# Altium PCB PCB_Master_Screen_V2.00.PcbDoc
Units mm, origin at the board's own origin, x right, y up, seen from the top; angles counter-clockwise.
Board outline 116.97 x 59.18 mm, 2 copper layers (Top Layer, Bottom Layer), stack 1.571 mm thick; 47 components, 37 nets, 220 pads, 201 vias.
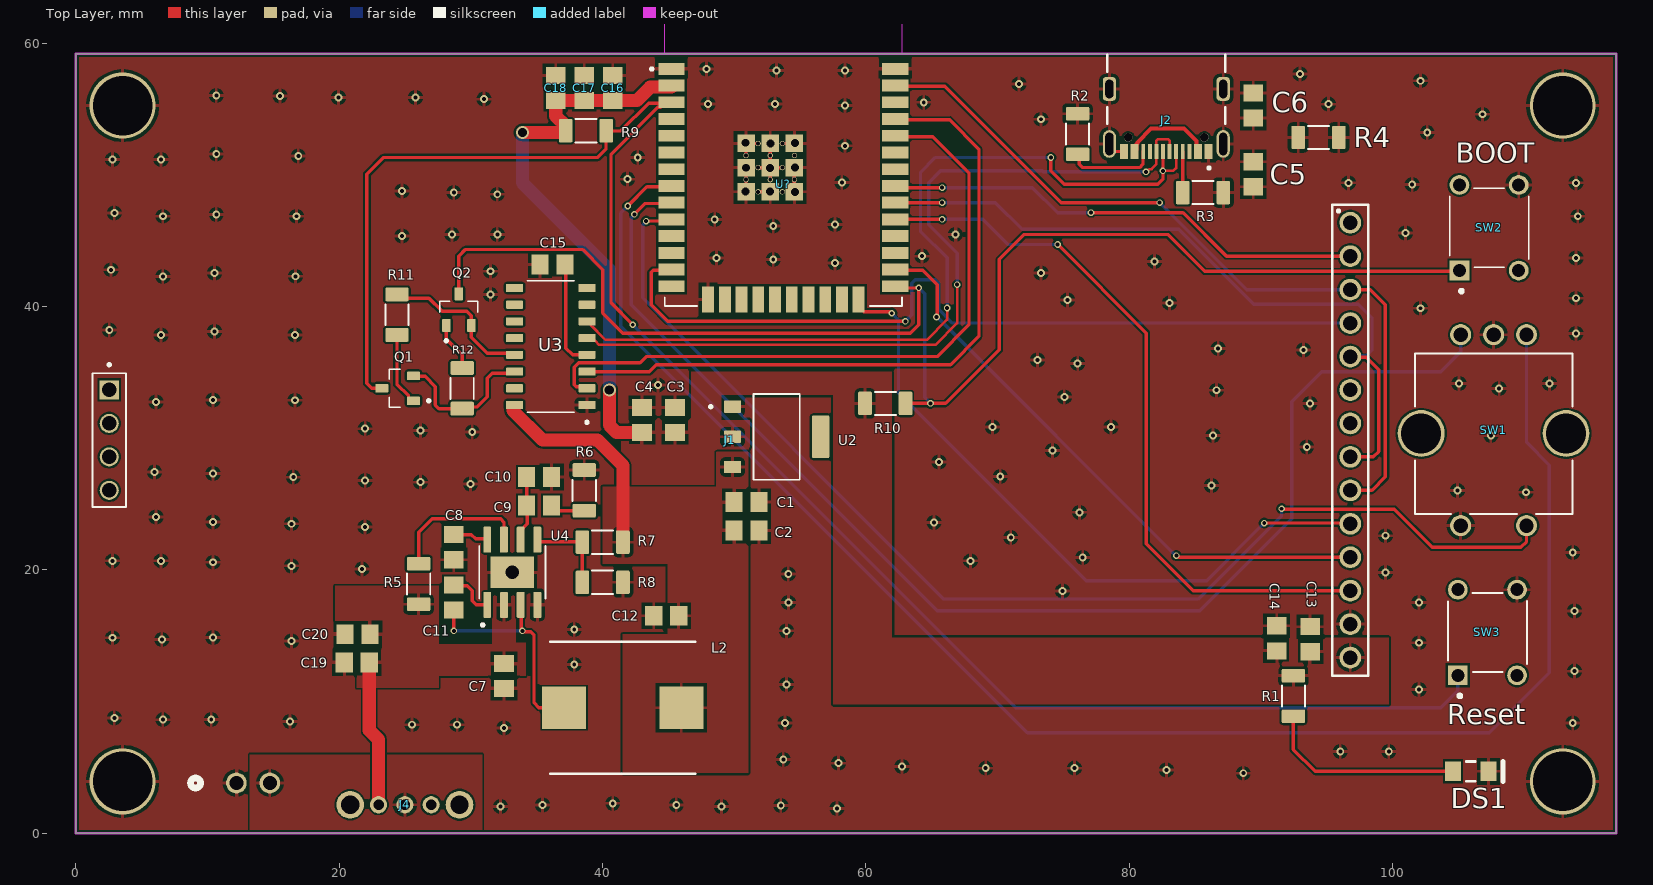
[diagram p0: Top Layer view]
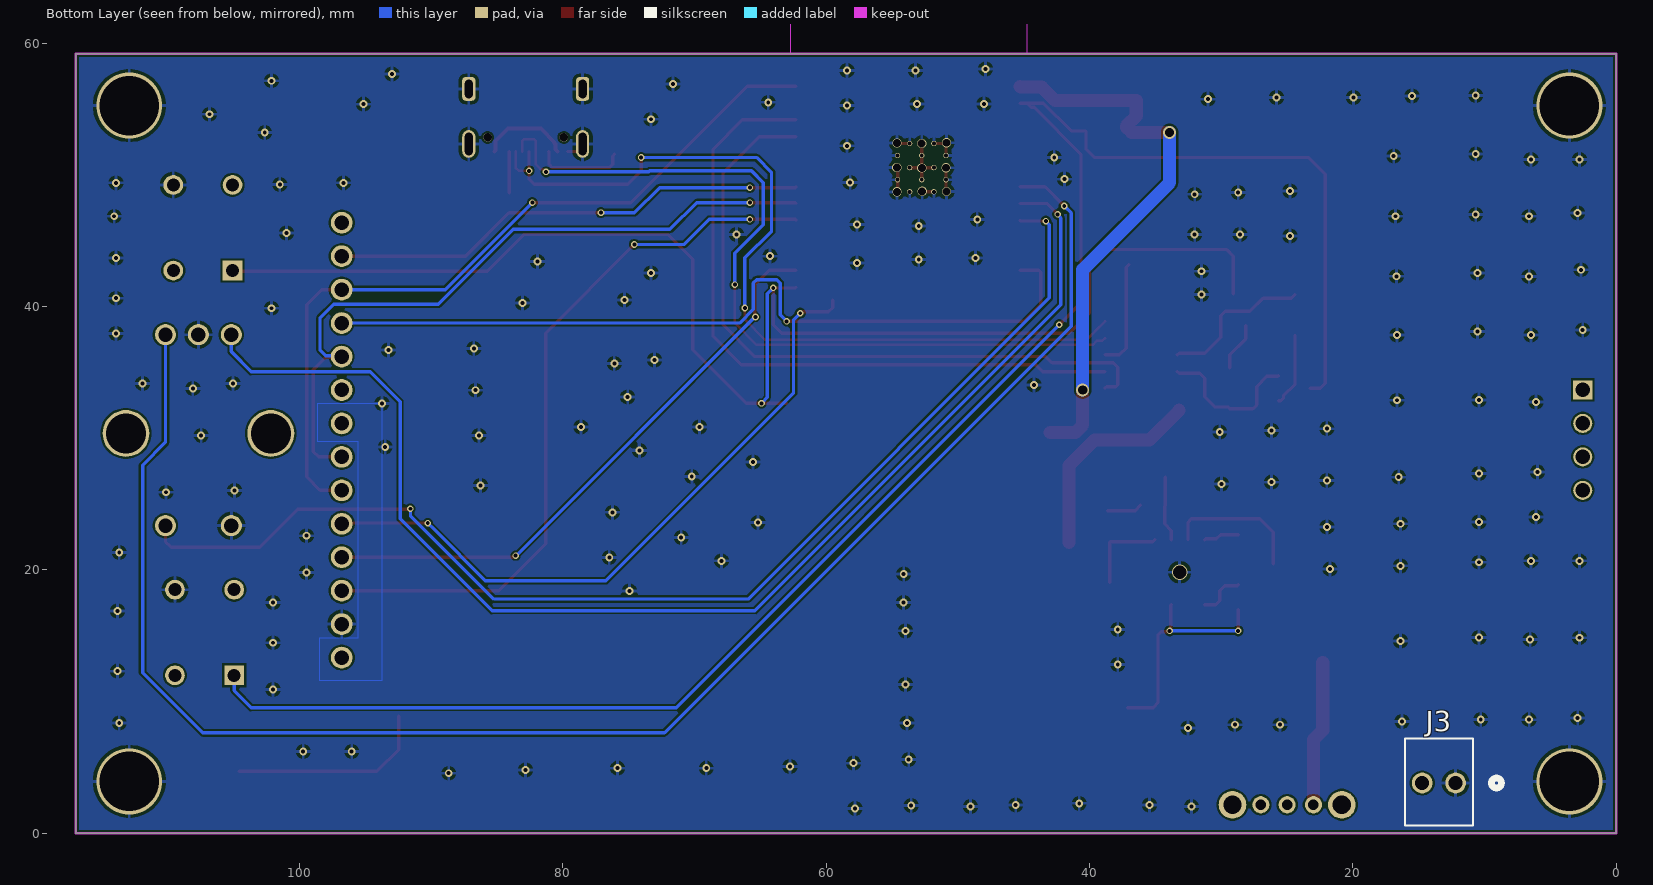
[diagram p1: Bottom Layer view, seen from below]
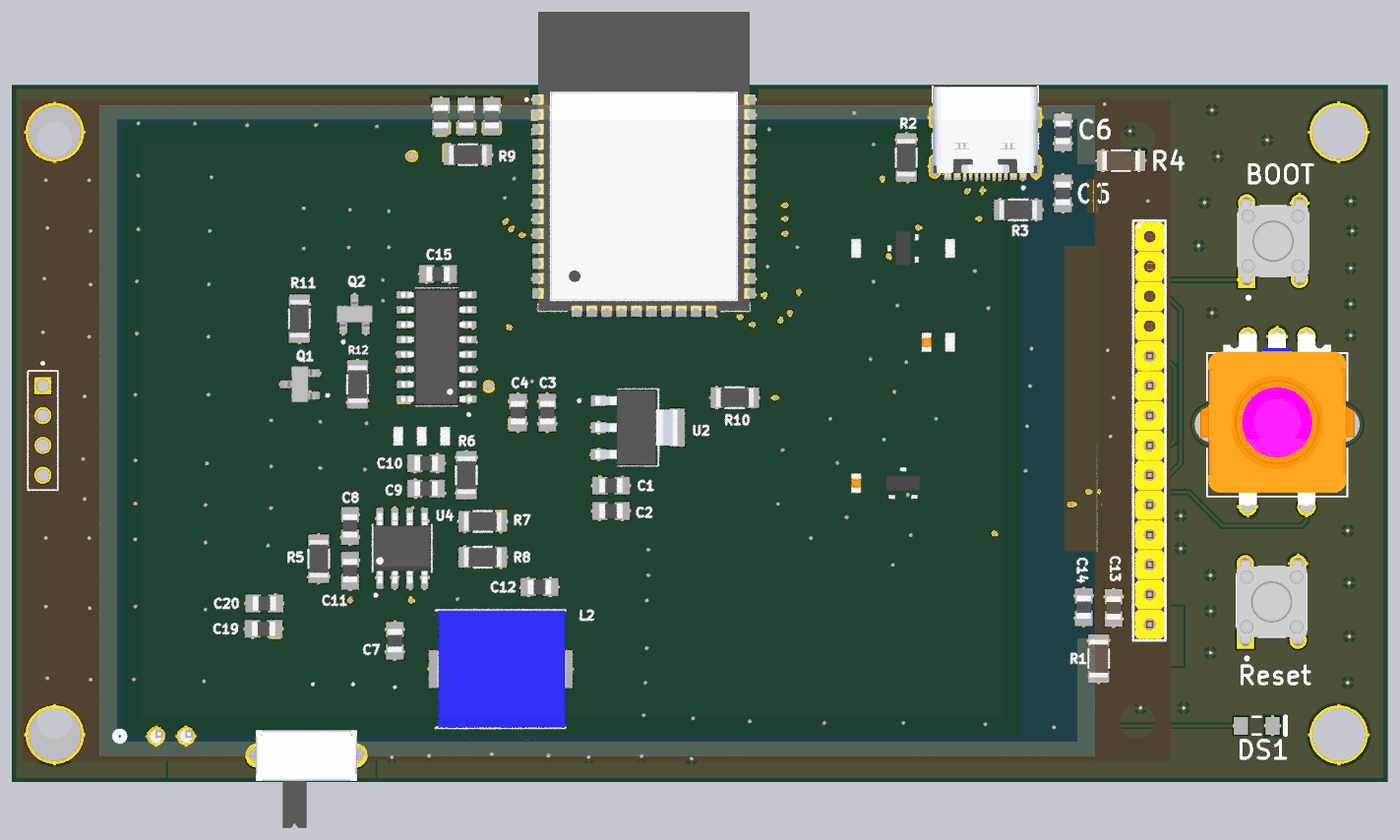
[diagram p2: 3D render of the assembled board from above, using the file's embedded part models]

## Layer stack, top to bottom
Top Solder: solder mask 0.0102, Solder Resist, Dk 3.5
Top Layer: signal copper 0.0356
Dielectric 1: dielectric 1.5, FR-4, Dk 4.8
Bottom Layer: signal copper 0.0356
Bottom Solder: solder mask 0.0102, Solder Resist, Dk 3.5

## Board outline
0,0 116.967,0 116.967,59.182 0,59.182

## Design rules (kind name [scope] priority, off if disabled: settings)
Clearance [All] p1: gap=0.15 ignorepadtopadclearanceinfootprint=FALSE
HoleSize [All] p1: absolutevalues=TRUE maxlimit=6.3 minlimit=0.3 maxpercent=80.000 minpercent=20.000
MinimumSolderMaskSliver [InComponent('U4')] p1: minsoldermaskwidth=0.05
MinimumSolderMaskSliver MinimumSolderMaskSliver_1 [All] p2: minsoldermaskwidth=0.1
PolygonConnect [All] p1: connectstyle=Relief reliefconductorwidth=0.254 reliefentries=4 polygonreliefangle="90 Angle" airgapwidth=0.254
RoutingVias [All] p1: holewidth=0.3 width=0.5 viastyle="Through Hole" minholewidth=0.3 minwidth=0.4 maxholewidth=6.3 maxwidth=7
SilkToSolderMaskClearance SilkToSolderMaskClearance_R [HasFootprint('RES1206')] p1: minsilkscreentomaskgap=0.1 clearancetoexposedcopper=TRUE
SilkToSolderMaskClearance [IsPad] p2: minsilkscreentomaskgap=0.2 clearancetoexposedcopper=TRUE
SolderMaskExpansion [All] p1: expansion=0.102 istentingtop=FALSE
SupplyNets "Schematic Supply Nets_4" [InNet('VIN')] p1: voltage=0.000
SupplyNets "Schematic Supply Nets_3" [InNet('5V0')] p2: voltage=0.000
SupplyNets "Schematic Supply Nets_2" [InNet('VBAT')] p3: voltage=0.000
SupplyNets "Schematic Supply Nets_1" [InNet('GND')] p4: voltage=0.000
SupplyNets "Schematic Supply Nets" [InNet('3V3')] p5: voltage=0.000
Width Width_Pwr [InNet('3V3') OR InNet('5V0') OR InNet('VBAT')] p1: maxlimit=2 minlimit=1 preferedwidth=1.2
Width Width_1 [All] p2: maxlimit=1.5 minlimit=0.2 preferedwidth=0.254 minimp=50.000000 maximp=50.000000 favimp=50.000000
27 further rules are at their usual default settings.

## Components (designator, comment, footprint, x,y, rotation, side; value= is the part's Value field where it differs from the comment)
C1 "10uF" CAP0805 50.927,25.146 r180 top value=805
C2 "100nF" CAP0805 50.927,22.987 r180 top value=805
C3 "22uF" CAP0805 45.5,31.369 r90 top value=805
C4 "100nF" CAP0805 43,31.369 r90 top value=805
C5 "100nF" CAP0805 89.408,50.038 r270 top value=805
C6 "1nF" CAP0805 89.408,55.245 r270 top value=805
C7 "4.7uF" CAP0805 32.512,11.938 r90 top value=805
C8 "0.1uF" CAP0805 28.702,21.717 r90 top value=805
C9 "6.8nF" CAP0805 35.179,24.892 r180 top value=805
C10 "0.1nF" CAP0805 35.179,27.051 r180 top value=805
C11 "10nF" CAP0805 28.702,17.907 r270 top value=805
C12 "10uF" CAP0805 44.831,16.51 r0 top value=805
C13 "100nF" CAP0805 93.726,14.732 r270 top value=805
C14 "10uF" CAP0805 91.186,14.798 r270 top value=805
C15 "100nF" CAP0805 36.195,43.18 r180 top value=805
C16 "47uF" CAP0805 40.767,56.581 r90 top value=805
C17 "22uF" CAP0805 38.608,56.581 r90 top value=805
C18 "100nF" CAP0805 36.449,56.581 r90 top value=805
C19 "47uF" CAP0805 21.336,12.954 r0 top value=805
C20 "100nF" CAP0805 21.402,15.113 r0 top value=805
DS1 "Red LED" LUMX-SML-LX1206IC_V 105.918,4.699 r0 top
J1 "TFT_3.5_INCH" 61301411121 96.774,29.845 r270 top locked value="3.5-inch TFT LCD (320 × 480)"
J2 "USB Type C 16P" GCT_USB4105-GF-A-060 82.804,56.515 r180 top value="16 Pin"
J3 "Battery Connector" CONN_A-6373-02A_MOL 12.192,3.81 r0 bottom value="2POS 2.54MM"
J4 "SK12D07VG4" SK12D07VG4 24.987,2.159 r0 top value="0.3A @ 30 VDC"
L2 "10uH" INDPM110100X400N 41.529,9.525 r0 top value="11 mm x 10 mm"
Q1 "MMBT3904" TRANS_MMBT3904 24.441,33.782 r180 top value=NPN
Q2 "MMBT3904" TRANS_MMBT3904 29.083,39.751 r90 top value=NPN
R1 "1K" RES1206 92.456,10.414 r270 top value=1206
R2 "5.1K" RES1206 76.073,53.086 r270 top value=1206
R3 "5.1K" RES1206 85.598,48.641 r180 top value=1206
R4 "1M" RES1206 94.361,52.832 r180 top value=1206
R5 "100K" RES1206 26.035,18.923 r270 top value=1206
R6 "6.8K" RES1206 38.608,26.035 r270 top value=1206
R7 "44.2K" RES1206 40.005,22.098 r0 top value=1206
R8 "10K" RES1206 40.005,19.05 r180 top value=1206
R9 "10K" RES1206 38.735,53.34 r180 top value=1206
R10 "10K" RES1206 61.468,32.639 r180 top value=1206
R11 "10K" RES1206 24.384,39.37 r90 top value=1206
R12 "10K" RES1206 29.337,33.782 r90 top value=1206
SW1 "EC11E15244G1" EC11E15244G1_AAL 110.157,37.853 r180 top value="10mA 5V DC"
SW2 "2-1825910-7" SW_2-1825910-7 107.315,45.974 r90 top value="Button 6mm"
SW3 "2-1825910-7" SW_2-1825910-7 107.188,15.24 r90 top value="Button 6mm"
U2 "AMS1117-3.3" SOT229P700X180-4N 53.213,30.099 r0 top value="0.8A, 15V"
U3 "CH340C" SOIC127P600X180-16N 36.068,36.957 r180 top value="USB to serial chip"
U4 "MP1484EN-LF" SOIC127P600X170-9N 33.147,19.812 r90 top value="0.925V 1 Output 3A"
U? "ESP32-WROOM-32" MODULE_ESP32-WROOM-32 53.73,52.779 r0 top value="Dual Core, Wi-Fi, BLE"

## Footprints (in the part's own frame and the unit in brackets; to place one, negate y for a bottom-side part, rotate by r counter-clockwise, add the part's x,y. Pads: shape width x height; smd on the part's side, far side on the other; paste and mask are expansions set on the pad)
61301411121 [mm]
  round 1.65 hole 1.1: 1(-16.51,0) 2(-13.97,0) 3(-11.43,0) 4(-8.89,0) 5(-6.35,0) 6(-3.81,0) 7(-1.27,0) 8(1.27,0) 9(3.81,0) 10(6.35,0) 11(8.89,0) 12(11.43,0) 13(13.97,0) 14(16.51,0)
  rect 1.45x1.45 / inner round 1.45 / far side rect 1.45x1.45 hole 1.1: 01(-3.81,-94.234)
  round 1.45 hole 1.1: 02(-1.27,-94.234) 03(1.27,-94.234) 04(3.81,-94.234)
  silkscreen extent -17.88,-95.5 17.88,1.37, body extent -28.15,-96.02 28.15,1.78, height 4.4
CAP0805 [mm]
  rect 1.3x1.5 smd: 1(-0.95,0) 2(0.95,0)
  body extent -1,-0.63 1,0.63, height 0.7
CONN_A-6373-02A_MOL [mil]
  round 62 hole 42: 1(0,0) 2(100,0)
  silkscreen extent -137,-133 152,127, body extent -37,-135 157,115, height 420
EC11E15244G1_AAL [mil]
  round 140 / inner round 60 / far side round 140 hole 120 paste-99999 mask-70: 6(-118.11,295.28) 7(314.96,295.28)
  round 63 / inner round 60 / far side round 63 hole 43: A(0,0) B(196.85,0)
  round 63 / inner round 60 / far side round 63 hole 43 unplated: C(98.43,0) E(196.85,570.87)
  round 63 hole 43: D(0,570.87)
  silkscreen extent -137,55 334,536, body extent -159,-16 356,572, height 965
GCT_USB4105-GF-A-060 [mm]
  rect 0.6x1.15 smd: A1(-3.2,4.755) A4(-2.4,4.755) B1(3.2,4.755) B4(2.4,4.755)
  rect 0.3x1.15 smd: A5(-1.25,4.755) A6(-0.25,4.755) A7(0.25,4.755) A8(1.25,4.755) B5(1.75,4.755) B6(0.75,4.755) B7(-0.75,4.755) B8(-1.75,4.755)
  oval 1x2.1 hole 0.6 slot 1.7 at 90 deg: SH1(-4.32,4.18) SH2(4.32,4.18)
  rrect50% 1x1.8 hole 0.6 slot 1.4 at 90 deg: SH3(-4.32,0) SH4(4.32,0)
  round 0.65 hole 0.65 unplated: ""(-2.89,3.68) ""(2.89,3.68)
  silkscreen extent -4.47,-2.6 4.47,6.1, body extent -4.47,-2.6 4.47,5.11, height 3.31
INDPM110100X400N [mm]
  rect 3.35x3.2 smd: 1(-4.45,0) 2(4.45,0)
  silkscreen extent -5.5,-5 5.5,5, body extent -5.41,-5 5.59,5, height 4
LUMX-SML-LX1206IC_V [mm] "SMD, 2-Leads, Body 3.2x1.5mm"
  rect 1.2x1.5 smd: 1(-1.35,0) 2(1.35,0)
  silkscreen extent -0.35,-0.75 2.45,0.75, body extent -1.6,-0.8 1.6,0.8, height 1.1
MODULE_ESP32-WROOM-32 [mm]
  rect 2x0.9 smd: 1(-8.5,5.26) 2(-8.5,3.99) 3(-8.5,2.72) 4(-8.5,1.45) 5(-8.5,0.18) 6(-8.5,-1.09) 7(-8.5,-2.36) 8(-8.5,-3.63) 9(-8.5,-4.9) 10(-8.5,-6.17) 11(-8.5,-7.44) 12(-8.5,-8.71) 13(-8.5,-9.98) 14(-8.5,-11.25) 25(8.5,-11.25) 26(8.5,-9.98) 27(8.5,-8.71) 28(8.5,-7.44) 29(8.5,-6.17) 30(8.5,-4.9) 31(8.5,-3.63) 32(8.5,-2.36) 33(8.5,-1.09) 34(8.5,0.18) 35(8.5,1.45) 36(8.5,2.72) 37(8.5,3.99) 38(8.5,5.26)
  rect 0.9x2 smd: 15(-5.715,-12.25) 16(-4.445,-12.25) 17(-3.175,-12.25) 18(-1.905,-12.25) 19(-0.635,-12.25) 20(0.635,-12.25) 21(1.905,-12.25) 22(3.175,-12.25) 23(4.445,-12.25) 24(5.715,-12.25)
  rect 1.33x1.33 smd: 39(-2.835,-4.075) 39(-2.835,-2.24) 39(-2.835,-0.405) 39(-1,-4.075) 39(-1,-2.24) 39(-1,-0.405) 39(0.835,-4.075) 39(0.835,-2.24) 39(0.835,-0.405)
  round 0.4 hole 0.3: 39(-2.835,-3.157) 39(-2.835,-1.322) 39(-1.917,-4.075) 39(-1.917,-2.24) 39(-1.917,-0.405) 39(-1,-3.157) 39(-1,-1.322) 39(-0.082,-4.075) 39(-0.082,-2.24) 39(-0.082,-0.405) 39(0.835,-3.157) 39(0.835,-1.322)
  Keep-Out Layer region: 9,6.45 -9,6.45 -9,12.75 9,12.75
  Keep-Out Layer region: 9,6.45 -9,6.45 -9,12.75 9,12.75
  silkscreen extent -10.1,-12.75 9,5.35, body extent -9,-12.75 9,12.75, height 3.2
RES1206 [mm] "Resistor, Chip; 3.20 mm L X 1.60 mm W X 0.65 mm H body (Case Code: 3216 mm / 1206 mil; Package: SAMSUNGEM RC3216; Tool: Library Expert Pro 19)"
  rrect19% 1.04x1.77 smd: 1(-1.54,0) 2(1.54,0)
  silkscreen extent -0.79,-0.88 0.79,0.88, body extent -1.6,-0.8 1.6,0.8, height 0.65
SK12D07VG4 [mm]
  round 1.308 hole 0.8: 1(-2,0) 2(2,0) COM(0,0)
  round 2.1 hole 1.4: M1(-4.15,0) M2(4.15,0)
  body extent -4.3,-6.15 4.3,2.15, height 4.7
SOIC127P600X170-9N [mm]
  rrect25% 1.97x0.6 smd: 1(-2.475,1.905) 2(-2.475,0.635) 3(-2.475,-0.635) 4(-2.475,-1.905) 5(2.475,-1.905) 6(2.475,-0.635) 7(2.475,0.635) 8(2.475,1.905)
  rect 2.41x3.3 smd paste-3: 9(0,0)
  silkscreen extent -4.1,-2.52 2,2.52, body extent -3,-2.45 3,2.45, height 1.7
SOIC127P600X180-16N [mm]
  rrect25% 1.31x0.62 smd: 1(-2.75,4.445) 2(-2.75,3.175) 3(-2.75,1.905) 4(-2.75,0.635) 5(-2.75,-0.635) 6(-2.75,-1.905) 7(-2.75,-3.175) 8(-2.75,-4.445) 9(2.75,-4.445) 10(2.75,-3.175) 11(2.75,-1.905) 12(2.75,-0.635) 13(2.75,0.635) 14(2.75,1.905) 15(2.75,3.175) 16(2.75,4.445)
  silkscreen extent -2.85,-5 1.78,5.85, body extent -3,-5 3,5, height 1.8
SOT229P700X180-4N [mm]
  rrect15% 1.31x0.93 smd: 1(-3.345,2.29) 2(-3.345,0) 3(-3.345,-2.29)
  rrect15% 1.31x3.24 smd: 4(3.345,0)
  silkscreen extent -5.1,-3.25 1.75,3.25, body extent -3.63,-3.25 3.37,3.25, height 1.8
SW_2-1825910-7 [mm]
  rect 1.498x1.498 hole 0.99: 1(-3.25,2.25)
  round 1.498 hole 0.99: 2(3.25,2.25) 3(-3.25,-2.25) 4(3.25,-2.25)
  silkscreen extent -4.92,-3 3,3, body extent -3.9,-3 3.9,3, height 4.2
TRANS_MMBT3904 [mm]
  rrect25% 1x0.65 smd paste+0 mask+0.102: 1(-1.2,0.95) 2(-1.2,-0.95) 3(1.2,0)
  silkscreen extent -2.46,-1.45 0.65,1.45, body extent -1.3,-1.52 1.3,1.52, height 1.3

## Part data
C1 C2 C3 C4 C5 C6 C7 C8 C9 C10 C11 C12 C13 C14 C15 C16 C17 C18 C19 C20: library part "Capacitor 0805", "Capacitor 0805", Package="0805 Yageo", TempMax=125, TempMin=-55, Check_prices=https://www.snapeda.com/parts/CC0805KRX7R9BB104/Yageo/view-part/?ref=eda, Link=-, MF=Yageo, MP=CC0805KRX7R9BB104, Part Number="Capacitor 0805", PartID="Capacitor 0805", SnapEDA_Link=https://www.snapeda.com/parts/CC0805KRX7R9BB104/Yageo/view-part/?ref=snap
DS1: library part CMP-2000-07123-1, "LED Red, 65 mW, -40 to 85 degC, 2-Pin SMD, RoHS, Tape and Reel", Color=Red, Manufacturer=Lumex, Operating Temperature=-25to85C, Package Description="2-Pin Surface Mount Device, Body 3.2 x 1.5 mm", Package Reference=SML-LX1206IC, Part No=SML-LX1206IC-TR, Reverse Voltage=5(Min)V, Supplier_Package=SMD, Datasheet URL=http://www.lumex.com/content/files/ProductAttachment/SML-LX1206IC-TR.pdf, Datasheet Version="Rev. J, 08/2012", Dimension=3.2x1.6x1.1mm, Dominant Wavelength=N/A, ECCN=EAR99, Family=SML-LX1206IC, HTS=8541402000, Intensity=6mcd, LED Material=GaAsP, Lens Appearance=ColorlessNonDiffused, Lens Dimensions=2x1.6x0.5mm, Manufacturer URL=http://www.lumexinstruments.com/, Mounting=SurfaceMount, Mounting Technology=SurfaceMount, Number of LEDs=1, Packaging=TapeandReel, Peak Wavelength=635nm, Pin_Count=2, RoHS=Unknown, Supplier=Lumex, Supplier Standard Pack=3,000, Type=Uni-Color, Viewing Angle=160
J1: library part TFT-ILI9488, "3.5-inch TFT LCD (320 × 480) with ILI9488 driver + XPT2046 resistive touch", Package=None, TempMax=85, TempMin=-30, Check_prices=https://www.snapeda.com/parts/61301411121/W%25C3%25BCrth+Elektronik+Midcom/view-part/?ref=eda, Link=https://grabcad.com/library/3-5-color-spi-display-based-on-ili9488-chip-1, MF="WÃ¼rth Elektronik", MP=61301411121, Part Number=TFT-ILI9488, PartID=TFT-ILI9488, SnapEDA_Link=https://www.snapeda.com/parts/61301411121/W%25C3%25BCrth+Elektronik+Midcom/view-part/?ref=snap
J2: library part USB4105-GF-A-060, "CONN RCP USB2.0 TYP C 16P SMD RA", Package=None, TempMax=85, TempMin=-40, Check_prices=https://www.snapeda.com/parts/USB4105GFA060/Global+Connector+Technology/view-part/?ref=eda, Link=https://gct.co/files/specs/usb4105-spec.pdf, MF="Global Connector Technology", MP=USB4105GFA060, Part Number=USB4105-GF-A-060, PartID=USB4105-GF-A-060, SnapEDA_Link=https://www.snapeda.com/parts/USB4105GFA060/Global+Connector+Technology/view-part/?ref=snap
J3: library part 22232021, "Connector Header Through Hole 2 position 0.100\" (2.54mm)", Package=None, TempMax=85, TempMin=-30, Check_prices=https://www.snapeda.com/parts/22232021/Molex/view-part/?ref=eda, Link=https://www.molex.com/en-us/products/part-detail/0022232021, MF=Molex, MP=22232021, Part Number=22232021, PartID=22232021, SnapEDA_Link=https://www.snapeda.com/parts/22232021/Molex/view-part/?ref=snap
J4: "Slide Switches - Side Knob", Package=None, TempMax=70, TempMin=-20, Check_prices=https://www.snapeda.com/parts/SK12D07VG4/C%2526K/view-part/?ref=eda, Link=https://www.snapeda.com/parts/SK12D07VG4/C&K/datasheet/, MF=C&K, MP=SK12D07VG4, Part Number=SK12D07VG4, PartID=SK12D07VG4, SnapEDA_Link=https://www.snapeda.com/parts/SK12D07VG4/C%2526K/view-part/?ref=snap
L2: library part SRP1038AA-R36M, "SMD Inductor 11x10mm", Manufacturer_Name=Bourns, Mouser Part Number=652-SRP1038AA-R36M, TempMax=155, TempMin=-55, Datasheet Link=https://www.bourns.com/docs/product-datasheets/srp1038aa.pdf?sfvrsn=2d1249f6_4, Geometry.Height=4mm, Link=https://gct.co/files/specs/usb4105-spec.pdf, Manufacturer_Part_Number=SRP1038AA-R36M, Mouser Price/Stock=https://www.mouser.co.uk/ProductDetail/Bourns/SRP1038AA-R36M?qs=CiayqK2gdcJABH4%252B3%252B0pzQ%3D%3D, Part Number=SRP1038AA-R36M, PartID=SRP1038AA-R36M
Q1 Q2: "TRANS NPN 40V 0.2A SOT23-3", Package="SOT-23 Diotec", TempMax=150, TempMin=-55, Check_prices=https://www.snapeda.com/parts/MMBT3904/Diotec/view-part/?ref=eda, Link=https://diotec.com/request/datasheet/mmbt3904.pdf, MF="Diotec Semiconductor", MP=MMBT3904, Part Number=MMBT3904, PartID=MMBT3904, SnapEDA_Link=https://www.snapeda.com/parts/MMBT3904/Diotec/view-part/?ref=snap
R1 R2 R3 R4 R5 R6 R7 R8 R9 R10 R11 R12: library part "Resistor 1206", "Resistor 1206", TempMax=125, TempMin=-55, Link=-, Part Number="Resistor 1206", PartID="Resistor 1206"
SW1: "EC11 Rotary Encoder with Switch", Manufacturer_Name="Alps Electric", TempMax=85, TempMin=-40, Copyright="Copyright (C) 2025 Ultra Librarian. All rights reserved.", Link=https://tech.alpsalpine.com/e/products/detail/EC11E15244G1/, Manufacturer_Part_Number=EC11E15244G1, Part Number=EC11E15244G1, PartID=EC11E15244G1, RefDes=RefDes, Type=Encoders
SW2 SW3: library part SW_2-1825910-7, "Button 6mm x 6mm", Package=None, TempMax=150, TempMin=-55, Availability=Unavailable, EU_RoHS_Compliance=Compliant, Link=https://www.digikey.de/de/products/detail/te-connectivity-alcoswitch-switches/2-1825910-7/1632528?srsltid=AfmBOorIgxPx8-RK9ZbRgtQifCi0fztvshC0t_fVXu46lzstz4pRWn6z, MF="TE Connectivity", MP=2-1825910-7, Part Number=SW_2-1825910-7, PartID=SW_2-1825910-7, Price=None, SnapEDA_Link=https://www.snapeda.com/parts/2-1825910-7/TE%20Connectivity%20ALCOSWITCH%20Switches/view-part/498898/?ref=snap, TE_purchase_URL=https://www.te.com/usa-en/product-2-1825910-7.html?te_bu=Cor&te_type=disp&te_campaign=seda_glo_cor-seda-global-disp-prtnr-fy19-seda-model-bom-cta_sma-317_1&elqCampaignId=32493
U2: "Linearer Spannungsregler, 800 mA, 15 V", Package="SOT-223 Seeed Technology", TempMax=125, TempMin=-40, Check_prices=https://www.snapeda.com/parts/AMS1117-3.3/Advanced+Monolithic+Systems/view-part/?ref=eda, Link=https://www.snapeda.com/parts/AMS1117-3.3/Advanced%20Monolithic%20Systems/datasheet/, MF="Advanced Monolithic Systems", MP=AMS1117-3.3, Part Number=AMS1117-3.3, PartID=AMS1117-3.3, SnapEDA_Link=https://www.snapeda.com/parts/AMS1117-3.3/Advanced+Monolithic+Systems/view-part/?ref=snap
U3: "USB to serial chip", Package=None, TempMax=85, TempMin=-30, Availability="Not in stock", Check_prices=https://www.snapeda.com/parts/CH340C/WCH/view-part/?ref=eda, Link=https://www.snapeda.com/parts/CH340C/WCH/datasheet/, MF=WCH, MP=CH340C, Part Number=CH340C, PartID=CH340C, Price=None, SnapEDA_Link=https://www.snapeda.com/parts/CH340C/WCH/view-part/?ref=snap
U4: "Buck Switching Regulator IC Positive Adjustable 0.925V 1 Output 3A 8-SOIC (0.154\", 3.90mm Width)", Package=None, TempMax=85, TempMin=-20, Availability=Unavailable, Link=https://www.digikey.at/de/products/detail/monolithic-power-systems-inc/MP1484EN-LF-Z/5291682?srsltid=AfmBOorvZqZweepwF19jqwdCHLwo1ck00ZSGZEtpVPLNX4bN2FRk_ecr, MP=MP1484EN-LF, Part Number=MP1484EN-LF, PartID=MP1484EN-LF, Price=None
U?: "Bluetooth, WiFi 802.11b/g/n, Bluetooth v4.2 +EDR, Class 1, 2 and 3 Transceiver Module U.FL Surface Mount", Package="Module Espressif Systems", TempMax=85, TempMin=-40, Availability="In Stock", Check_prices=https://www.snapeda.com/parts/ESP32-WROOM-32/Espressif+Systems/view-part/?ref=eda, Link=https://documentation.espressif.com/esp32-wroom-32_datasheet_en.pdf, MF="Espressif Systems", MP=ESP32-WROOM-32, Part Number=ESP32-WROOM-32, PartID=ESP32-WROOM-32, Price=None, Purchase-URL=https://pricing.snapeda.com/search/part/ESP32-WROOM-32/?ref=eda, SnapEDA_Link=https://www.snapeda.com/parts/ESP32-WROOM-32/Espressif+Systems/view-part/?ref=snap

## Via types
v1: diameter 0.6, hole 0.3, Top Layer to Bottom Layer, tented both sides, 160 vias
v2: diameter 0.5, hole 0.3, Top Layer to Bottom Layer, 25 vias
v3: diameter 0.7, hole 0.6, Top Layer to Bottom Layer, 9 vias
v4: diameter 5, hole 4.5, Top Layer to Bottom Layer, 4 vias
v5: diameter 1, hole 0.7, Top Layer to Bottom Layer, 2 vias
v6: diameter 1.2, hole 1, Top Layer to Bottom Layer, 1 vias

## Nets (pads, with @x,y where several pads share a name; then routed paths per layer and width w, separated by ;. In a path a pad name is that pad's centre, name@x,y a point inside that pad or via, vN(x,y) a via of type N, cw(c..) or ccw(c..) an arc to the next point about the centre after c; other vN are vias at no path point)
3V3: C3.1 C4.1 C13.2 C14.2 C16.1 C17.1 C18.1 J1.7 J1.14 R1.1 R9.2 R10.2 U2.2 U?.2 | length 42.7
  Top Layer w1: v5(33.909,53.213) 36.802,53.213 37.195,53.606 37.195,53.705 36.449,54.451 C18.1 C17.1 41.012,55.631 41.017,55.626 42.589,55.626 43.619,56.656 45.225,56.656 U?.2@45.275,56.706 ; v5(40.513,33.655) 40.513,30.988 41.082,30.419 C4.1
  Bottom Layer w1: v5(33.909,53.213) 33.909,49.403 40.513,42.799 v5(40.513,33.655)
5V0: C1.2 C2.2 C12.2 L2.2 R7.2 U2.3 U3.16 | length 15.9
  Top Layer w1: 33.191,32.131 33.191,32.096 35.442,29.845 39.624,29.845 41.545,27.924 R7.2
CLK: J1.5 J1.8 U?.30 | length 55.2
  Top Layer w0.254: U?.30@62.275,47.816 62.338,47.879 v2(65.786,47.879) ; J1.8 98.529,28.575 98.933,28.979 98.933,35.179 97.98,36.132 96.837,36.132 J1.5
  Bottom Layer w0.254: v2(65.786,47.879) 69.82,47.879 71.852,45.847 83.757,45.847 89.431,40.173 97.368,40.173 98.425,39.116 98.425,36.703 97.98,36.258 96.837,36.258 J1.5
CS: J1.12 U?.29 | length 55.6
  Top Layer w0.254: U?.29@62.275,46.546 62.338,46.609 v2(65.786,46.609) ; v2(74.549,44.704) 81.28,37.973 81.28,21.971 84.836,18.415 J1.12
  Bottom Layer w0.254: v2(65.786,46.609) 68.868,46.609 70.773,44.704 v2(74.549,44.704)
D/C: J1.10 U?.24 | length 51.5
  Top Layer w0.254: U?.24@59.49,40.466 59.49,39.916 59.813,39.593 61.781,39.593 61.892,39.483 v2(61.958,39.483) ; v2(90.242,23.55) 96.719,23.55 J1.10
  Bottom Layer w0.254: v2(61.958,39.483) 62.465,38.976 62.465,33.437 76.725,19.177 85.869,19.177 89.761,23.069 v2(90.242,23.55)
D_N: J2.A7 J2.B7 U3.6 | length 65.5
  Top Layer w0.2: U3.6 39.528,38.152 39.531,38.152 39.723,37.96 39.723,37.957 40.215,37.465 64.643,37.465 66.167,38.989 v2(66.167,39.878) ; J2.A7 82.552,51.758 82.552,50.294 v2(82.55,50.292) 83.331,50.292 83.554,50.515 J2.B7
  Top Layer w0.254: v2(74.041,51.308) 74.041,50.292 75.057,49.276 82.169,49.276 82.55,49.657 v2(82.55,50.292)
  Bottom Layer w0.254: v2(66.167,39.878) 66.167,43.688 64.135,45.72 64.135,50.165 65.278,51.308 v2(74.041,51.308)
D_P: J2.A6 J2.B6 U3.5 | length 62.2
  Top Layer w0.2: U3.5 39.028,37.382 39.446,37.382 39.744,37.084 65.278,37.084 66.929,38.735 v2(66.929,41.656) ; v2(81.261,50.212) 81.315,50.212 81.528,50.426 81.679,50.426 82.054,50.801 J2.B6 82.054,52.588 82.171,52.705 82.941,52.705 83.058,52.588 83.058,51.764 J2.A6
  Bottom Layer w0.254: v2(66.929,41.656) 66.929,44.039 64.77,46.198 64.77,49.403 65.659,50.292 73.387,50.292 73.466,50.212 v2(81.261,50.212)
EN: Q1.3 R9.1 SW3.1 U?.3 | length 139.1
  Top Layer w0.254: Q1.3 22.479,33.782 22.098,34.163 22.098,50.038 23.368,51.308 39.624,51.308 40.259,51.943 40.259,53.324 41.386,53.324 43.498,55.436 44.725,55.436 U?.3@45.275,55.436 ; v2(42.291,38.608) 40.64,40.259 40.64,51.562 44.191,55.113 44.402,55.113 44.641,55.352 U?.3@44.641,55.436
  Bottom Layer w0.254: v2(42.291,38.608) 71.374,9.525 103.632,9.525 104.938,10.831 SW3.1
GND: C1.1 C2.1 C3.2 C4.2 C5.1 C5.2 C6.1 C6.2 C7.1 C8.1 C10.1 C12.1 C13.1 C14.1 C15.2 C16.2 C17.2 C18.2 C19.1 C20.1 DS1.2 J1.13 J2.A1 J2.B1 J2.SH1 J2.SH2 J2.SH3 J2.SH4 J3.1 R2.1 R3.1 R4.1 R4.2 R6.1 R8.1 SW1.C SW1.E SW2.4 SW3.4 U2.1 U3.1 U4.4 U4.9 U?.1 U?.15 U?.38 U?.39 | length 13.8
  Top Layer w0.254: v3(50.851,52.428) 50.851,52.418 U?.39@50.895,52.374 ; v3(50.853,48.724) 50.873,48.704 50.895,48.704 50.895,50.539 50.895,50.537 v3(50.884,50.526) ; U?.39@50.895,51.457 U?.39@50.895,52.374 ; U?.39@51.812,48.704 52.73,48.704 U?.39@52.698,48.736 ; U?.39@51.812,50.539 U?.39@52.73,50.539 ; U?.39@51.812,52.374 U?.39@50.895,52.374 ; v3(52.727,50.507) 52.73,50.51 U?.39@52.73,50.539 ; U?.39@52.73,49.622 U?.39@52.73,50.539 ; v3(52.736,52.379) v3(52.736,52.379) 52.73,52.374 52.73,51.457 U?.39@52.73,50.539 ; U?.39@53.648,50.539 U?.39@52.73,50.539 ; U?.39@53.648,52.374 54.565,52.374 54.594,52.403 v3(54.613,52.403) ; v3(54.61,48.7) 54.606,48.704 54.565,48.704 54.565,49.622 54.565,50.539 54.571,50.545 v3(54.623,50.545) ; J2.SH2 78.484,52.105 78.829,51.76 J2.B1
  other v1: 57.789,1.888 32.262,2.015 49.026,2.015 53.533,2.101 35.437,2.142 45.597,2.142 40.771,2.269 88.65,4.555 82.808,4.809 69.092,4.936 75.823,4.936 62.742,5.063 57.916,5.317 53.721,5.588 96.016,6.206 99.699,6.206 32.516,7.984 25.531,8.238 28.96,8.238 53.852,8.365 113.669,8.365 16.26,8.492 6.608,8.619 10.287,8.636 2.925,8.746 101.985,10.905 53.975,11.303 113.796,12.302 37.85,12.81 101.985,14.461 16.387,14.588 6.531,14.713 2.798,14.842 10.414,14.859 53.975,15.367 37.85,15.477 113.796,16.874 54.106,17.509 101.985,17.509 74.934,18.398 54.102,19.685 99.445,19.795 21.721,20.049 16.387,20.303 10.414,20.574 2.798,20.684 6.481,20.684 67.949,20.684 76.458,20.938 113.669,21.319 70.997,22.462 99.445,22.589 21.971,23.241 16.383,23.495 65.155,23.605 10.414,23.622 6.096,24.003 76.204,24.367 110.113,25.891 104.906,26.018 86.237,26.399 29.976,26.526 26.166,26.653 21.975,26.78 16.514,27.034 70.196,27.094 10.414,27.305 5.973,27.415 65.536,28.177 74.172,29.066 93.472,29.337 86.364,30.209 107.446,30.209 30.103,30.463 26.166,30.59 21.975,30.717 69.6,30.844 78.617,30.844 93.726,32.639 6.1,32.749 16.641,32.876 10.414,32.893 75.061,33.13 86.618,33.638 108.081,33.765 44.196,34.036 105.033,34.146 111.891,34.146 76.077,35.67 73.029,35.924 93.222,36.686 86.745,36.813 6.481,37.829 16.641,37.829 113.923,37.956 10.541,38.1 2.544,38.21 102.112,39.861 83.058,40.259 75.315,40.496 113.923,40.623 31.496,40.894 6.608,42.274 16.676,42.288 73.283,42.528 10.541,42.545 31.496,42.672 2.671,42.782 57.658,43.307 81.919,43.417 52.959,43.561 113.923,43.671 48.641,43.688 64.262,43.815 24.765,45.339 28.579,45.449 32.008,45.449 66.802,45.466 100.969,45.576 52.959,46.101 57.658,46.228 48.514,46.609 6.608,46.846 16.768,46.846 114.05,46.846 10.668,46.99 2.925,47.1 32.004,48.514 28.702,48.641 24.765,48.768 101.477,49.259 96.651,49.386 113.923,49.386 58.166,49.403 41.884,49.661 2.798,51.164 6.481,51.164 42.672,51.308 16.895,51.418 10.668,51.562 58.42,52.197 102.62,53.196 73.283,54.212 106.811,54.593 58.42,55.245 95.127,55.355 48.006,55.372 53.086,55.372 64.389,55.499 30.992,55.736 19.943,55.863 25.785,55.863 15.498,55.99 10.668,56.007 71.632,56.879 102.112,57.133 92.968,57.641 53.213,57.912 58.42,57.912 47.879,58.039
  other v3: 52.698,48.737
  other v4: 3.556,3.937 112.903,3.937 3.556,55.245 112.903,55.245
  other v6: 33.147,19.812
IO0: Q2.3 R10.1 SW2.1 U?.25 | length 109.1
  Top Layer w0.254: Q2.3 29.083,43.815 29.591,44.323 38.481,44.323 40.005,42.799 40.005,39.497 41.529,37.973 63.373,37.973 64.008,38.608 v2(64.008,41.402) 62.339,41.402 U?.25@62.275,41.466 ; R10.1 66.04,32.639 70.113,36.712 70.113,43.57 72.009,45.466 82.931,45.466 85.725,42.672 105.013,42.672 SW2.1
  Bottom Layer w0.254: v2(64.008,41.402) 64.008,41.399 64.453,40.954 64.453,33.087 64.897,32.642 v2(64.897,32.639)
IO25: SW1.D U?.10 | length 90.2
  Top Layer w0.254: v2(43.307,46.482) 45.211,46.482 U?.10@45.275,46.546 ; v2(91.567,24.638) 91.608,24.597 100.117,24.597 102.997,21.717 109.728,21.717 110.157,22.146 SW1.D
  Bottom Layer w0.254: v2(43.307,46.482) 43.307,46.464 43.053,46.21 43.053,40.64 65.913,17.78 85.217,17.78 91.554,24.117 91.554,24.625 v2(91.567,24.638)
IO32: SW1.A U?.8 | length 124.9
  Top Layer w0.254: v2(41.91,47.625) 43.371,49.086 U?.8@45.275,49.086
  Bottom Layer w0.254: v2(41.91,47.625) 41.383,47.098 41.383,38.5 72.263,7.62 107.315,7.62 111.887,12.192 111.887,27.94 110.157,29.67 SW1.A
IO33: SW1.B U?.9 | length 97.4
  Top Layer w0.254: v2(42.418,46.99) 43.244,47.816 U?.9@45.275,47.816
  Bottom Layer w0.254: v2(42.418,46.99) 42.418,46.972 42.164,46.718 42.164,40.132 65.405,16.891 85.344,16.891 92.329,23.876 92.329,32.766 94.615,35.052 103.632,35.052 105.157,36.577 SW1.B
MISO: J1.2 U?.31 | length 36.7
  Top Layer w0.254: U?.31@62.275,49.086 62.339,49.022 v2(65.786,49.022) ; v2(77.089,47.117) 84.074,47.117 87.376,43.815 J1.2
  Bottom Layer w0.254: v2(65.786,49.022) 72.644,49.022 74.549,47.117 v2(77.089,47.117)
MOSI: J1.3 J1.9 U?.37 | length 60.2
  Top Layer w0.254: U?.37@62.275,56.706 66,56.706 74.827,47.879 v2(82.296,47.879) ; J1.9 98.425,26.035 99.441,27.051 99.441,40.132 98.298,41.275 J1.3
  Bottom Layer w0.254: v2(82.296,47.879) 88.9,41.275 J1.3
NetC8_2: C8.2 U4.8 | length 2.7
  Top Layer w0.254: C8.2 30.038,22.667 30.353,22.352 31.177,22.352 U4.8
NetC9_1: C9.1 R6.2 | length 2.6
  Top Layer w0.254: C9.1 36.526,24.495 R6.2
NetC9_2: C9.2 C10.2 U4.6 | length 5
  Top Layer w0.254: U4.6 33.782,22.972 34.29,23.48 34.29,24.831 C9.2 C10.2
NetC11_1: C11.1 U4.1 | length 3.6
  Top Layer w0.254: C11.1 28.763,18.796 29.718,18.796 30.099,18.415 30.099,17.653 30.415,17.337 U4.1
NetC11_2: C11.2 L2.1 U4.3 | length 17.4
  Top Layer w0.254: v2(28.702,15.367) C11.2 ; U4.3 33.836,17.283 33.836,15.506 33.909,15.434 v2(33.909,15.367) 33.976,15.367 34.039,15.303 34.535,15.303 34.798,15.04 34.798,9.897 35.163,9.532 37.072,9.532 L2.1
  Bottom Layer w0.254: v2(28.702,15.367) v2(33.909,15.367)
NetC15_1: C15.1 U3.4 | length 8.2
  Top Layer w0.254: C15.1@37.018,43.18 37.211,42.987 37.211,36.83 37.719,36.322 U3.4
NetDS1_1: DS1.1 R1.2 | length 15.3
  Top Layer w0.254: R1.2 92.456,6.35 94.107,4.699 DS1.1
NetJ2_A5: J2.A5 R3.2 | length 3.1
  Top Layer w0.254: J2.A5 84.054,49.931 84.058,49.927 R3.2
NetJ2_B5: J2.B5 R2.2 | length 6.8
  Top Layer w0.254: R2.2 76.206,51.413 76.206,50.794 76.454,50.546 80.772,50.546 81.031,50.805 81.031,51.737 J2.B5
NetJ3_2: J3.2 J4.COM
NetQ1_1: Q1.1 R11.1 | length 5.6
  Top Layer w0.254: R11.1 24.384,34.089 25.268,33.205 25.268,33.03 25.466,32.832 Q1.1
NetQ1_2: Q1.2 R12.1 U3.14 | length 11.5
  Top Layer w0.254: Q1.2 25.681,34.692 26.522,34.692 27.305,33.909 27.305,32.512 27.575,32.242 R12.1 29.454,32.359 30.454,32.359 31.242,33.147 31.242,34.544 31.623,34.925 33.191,34.925 U3.14
NetQ2_1: Q2.1 R12.2 | length 3.7
  Top Layer w0.254: Q2.1 28.133,37.526 29.337,36.322 R12.2
NetQ2_2: Q2.2 R11.2 U3.13 | length 11.8
  Top Layer w0.254: R11.2 24.677,40.617 26.82,40.617 27.813,39.624 29.686,39.624 30.027,39.283 30.027,38.557 Q2.2 30.033,37.658 31.242,36.449 33.191,36.449 U3.13
NetR5_1: R5.1 U4.7 | length 10.7
  Top Layer w0.254: R5.1 26.035,22.86 27.051,23.876 32.258,23.876 32.512,23.622 U4.7
NetR7_1: R7.1 R8.2 U4.5 | length 6.5
  Top Layer w0.254: U4.5 35.209,22.13 38.433,22.13 R7.1 R8.2
RESET: J1.11 U?.26 | length 45
  Top Layer w0.254: U?.26@62.275,42.736 64.325,42.736 65.405,41.656 65.405,39.243 v2(65.358,39.196) ; v2(83.566,21.082) 83.633,21.082 83.76,20.955 J1.11
  Bottom Layer w0.254: v2(65.358,39.196) 65.405,39.196 83.519,21.082 v2(83.566,21.082)
RXD: U3.3 U?.35 | length 52.3
  Top Layer w0.254: U3.3 43.561,35.052 44.069,35.56 66.421,35.56 68.58,37.719 68.58,51.943 66.357,54.166 U?.35@62.275,54.166
T_CS: J1.4 U?.13 | length 63
  Top Layer w0.254: U?.13@45.275,42.736 43.837,42.736 43.688,42.587 43.688,40.132 44.958,38.862 v2(62.992,38.862)
  Bottom Layer w0.254: v2(62.992,38.862) 63.481,39.351 63.481,41.764 63.754,42.037 65.278,42.037 65.532,41.783 65.532,39.768 66.565,38.735 J1.4
TXD: U3.2 U?.34 | length 52
  Top Layer w0.254: U3.2 38.691,33.909 37.995,33.909 37.846,34.058 37.846,35.391 38.19,35.735 42.847,35.735 43.307,36.195 65.405,36.195 67.818,38.608 67.818,50.165 65.087,52.896 U?.34@62.275,52.896
VBAT: C7.2 C19.2 C20.2 J4.1 R5.2 U4.2 | length 11.1
  Top Layer w1: C19.2 22.286,7.813 22.987,7.112 J4.1
VIN: J2.A4 J2.B4 | length 6.9
  Top Layer w0.3: J2.B4 80.554,51.91 80.554,52.328 80.604,52.378 80.604,52.459 81.645,53.5 84.145,53.5 85.089,52.556 85.089,51.852 J2.A4@85.181,51.76
pads on no net: J1.01 J1.1 J1.02 J1.03 J1.04 J1.6 J2. J2.A8 J2.B8 J4.2 J4.M1 J4.M2 SW1.6 SW1.7 SW2.2 SW2.3 SW3.2 SW3.3 U2.4 U3.7 U3.8 U3.9 U3.10 U3.11 U3.12 U3.15 U?.4 U?.5 U?.6 U?.7 U?.11 U?.12 U?.14 U?.16 U?.17 U?.18 U?.19 U?.20 U?.21 U?.22 U?.23 U?.27 U?.28 U?.32 U?.33 U?.36

## Polygon pours and split planes (outlines as drawn)
GND on Top Layer "GND_L01_P004" (solid, remove dead copper, pour order 4): 0.06,59.144 0.06,-0.038 117.027,-0.038 117.027,59.144
3V3 on Top Layer "3V3_L01_P007" (solid, pour order 7): 46.736,31.115 46.736,35.052 61.976,35.052 61.976,31.115 57.531,31.115 57.531,33.274 49.022,33.274 49.022,31.115 48.895,31.115
3V3 on Top Layer "3V3_L01_P011" (solid, pour order 11): 51.181,26.035 51.181,31.369 46.99,31.369 46.99,31.496 41.402,31.496 41.402,26.035
3V3 on Top Layer "3V3_L01_P008" (solid, pour order 8): 99.695,14.859 61.976,14.859 61.976,31.369 57.531,31.369 57.531,9.779 99.695,9.779
VBAT on Top Layer "VBAT_L01_P002" (solid, pour order 2): 27.559,11.049 21.336,11.049 21.336,16.129 19.685,16.129 19.685,18.796 27.559,18.796 27.559,14.351 31.623,14.351 31.623,18.542 33.401,18.542 33.401,14.478 34.163,14.478 34.163,11.938 27.559,11.938
5V0 on Top Layer "5V0_L01_P005" (solid, pour order 5): 41.529,15.113 41.529,4.572 51.054,4.572 51.054,28.956 48.641,28.956 48.641,26.289 40.005,26.289 40.005,20.447 44.958,20.447 44.958,15.113
NetJ3_2 on Top Layer "NETJ3_2_L01_P000" (solid, pour order 0): 13.208,5.969 13.208,0.254 30.861,0.254 30.861,5.969 23.749,5.969 19.685,5.969
GND on Bottom Layer "GND_L02_P001" (solid, remove dead copper, pour order 1): 0,59.182 0,0 116.967,0 116.967,59.182
3V3 on Bottom Layer "3V3_L02_P010" (solid, pour order 10): 98.612,32.639 93.726,32.639 93.726,11.557 98.425,11.557 98.425,14.859 95.504,14.859 95.504,29.718 98.612,29.718

## Keep-outs
Keep-Out Layer:
  the board outline again, w0.2

## Silkscreen, mask and mechanical layers (free items; w line width, h text height)
Top Overlay:
  text "BOOT" at 104.775,50.927 h1.52
  text "Reset" at 104.14,8.255 h1.52
Board Shape:
  the board outline again, w0.2

## Text inside footprints (layer, text, board x,y; h text height)
J2: Mechanical 13 "PCB EDGE" at 77.404,59.015 h0.41 r180
U?: Mechanical 13 "ANTENNA" at 47.73,61.779 h1.78